# EAGLE board ProtoPass (EAGLE 9.0.1)
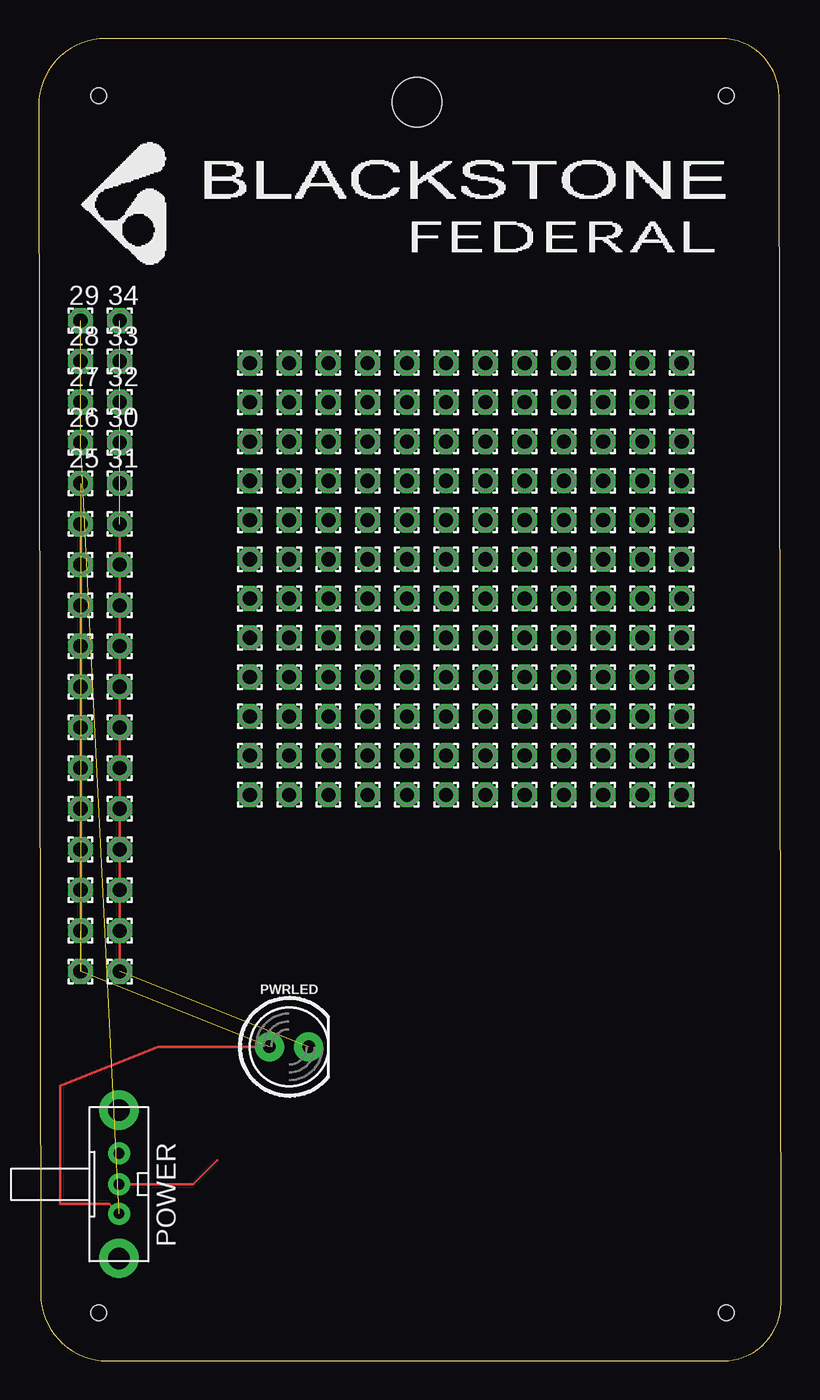
[diagram p0: board, top side]
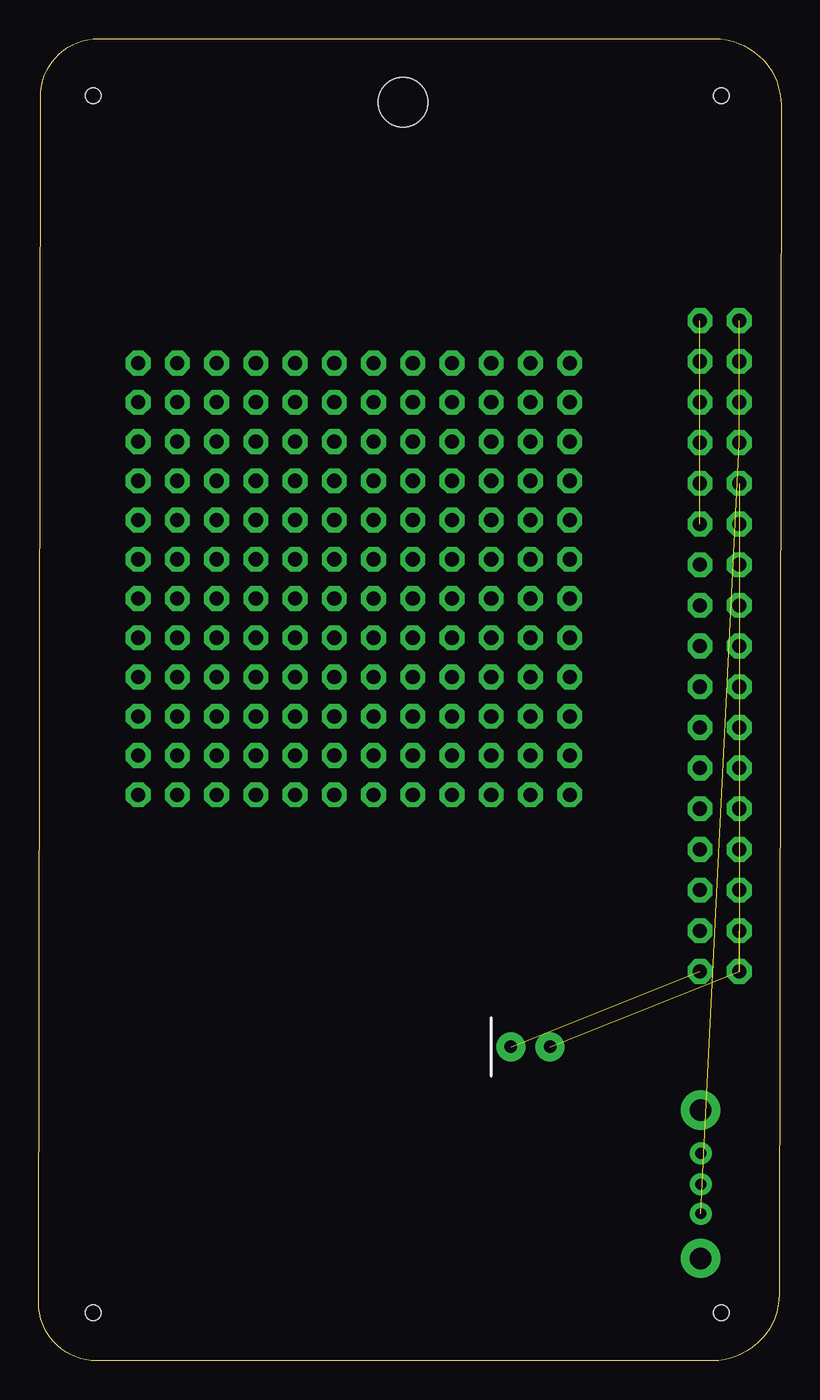
[diagram p1: board, bottom side, seen from below]

Size 48.05 x 85.56 mm. Coordinates in mm from the lower left corner, seen from the top.
Outline: 44.19,85.56 4.32,85.56 arc90 0,81.24 0.12,4.34 arc90 4.46,0 44.3,0 arc90 48.05,3.75 47.93,81.82 arc90 44.19,85.56
Copper layers (1*16): Top 0.035mm / dielectric 1.5mm / Bottom 0.035mm
Design rules "default": minimum track width 6mil, minimum drill 0.35mm, track to track 6mil, track to pad 6mil, pad to pad 6mil, via to via 6mil, smd to smd 6mil, copper to edge 40mil, drill to drill 6mil, minimum pad ring 10mil, minimum via ring 8mil, stop-mask expansion 4mil, vias tented up to drill 0mil, thermal gap 10mil
Holes 3.2 mm at 24.48,81.43
Holes 1 mm at 44.51,3.1 3.87,3.1 44.52,81.86 3.88,81.86

## Footprints (pad centres in the part's own frame; a part is rotated, then mirrored left to right if it is on the bottom)
1,6/0,9 = drill 0.914 pad 1.6 octagon: 1 0,0
EG1213 = drill 0.7 pad 1.422: 1 -2,0; 2 0,0; 3 1.9,0 | drill 1.4 pad 2.54: MT1 -4.8,0; MT2 4.8,0
LED_5MM = drill 0.813 pad 1.88: A -1.27,0; K 1.27,0

## Placement (x,y rotation side)
1  [1,6/0,9]  2.71,25.2 270 top
2  [1,6/0,9]  2.71,27.83 270 top
3  [1,6/0,9]  2.71,30.46 270 top
4  [1,6/0,9]  2.71,33.09 270 top
5  [1,6/0,9]  2.71,35.73 270 top
6  [1,6/0,9]  2.71,38.36 270 top
7  [1,6/0,9]  2.71,40.99 270 top
8  [1,6/0,9]  2.71,43.62 270 top
9  [1,6/0,9]  2.71,46.25 270 top
10  [1,6/0,9]  2.71,48.89 270 top
11  [1,6/0,9]  2.71,51.52 270 top
12  _  [1,6/0,9]  2.71,54.15 270 top
13  [1,6/0,9]  5.25,54.15 0 top
14  [1,6/0,9]  5.25,51.52 180 top
15  [1,6/0,9]  5.25,48.89 270 top
16  [1,6/0,9]  5.25,46.25 270 top
17  [1,6/0,9]  5.25,43.62 270 top
18  [1,6/0,9]  5.25,40.99 270 top
19  [1,6/0,9]  5.25,38.36 270 top
20  [1,6/0,9]  5.25,35.73 270 top
21  [1,6/0,9]  5.25,33.09 270 top
22  [1,6/0,9]  5.25,30.46 270 top
23  [1,6/0,9]  5.25,27.83 270 top
24  [1,6/0,9]  5.25,25.2 270 top
25  _  [1,6/0,9]  2.71,56.78 0 top
26  _  [1,6/0,9]  2.71,59.41 0 top
27  _  [1,6/0,9]  2.71,62.05 0 top
28  _  [1,6/0,9]  2.71,64.68 0 top
29  _  [1,6/0,9]  2.71,67.31 0 top
30  [1,6/0,9]  5.25,59.41 0 top
31  [1,6/0,9]  5.25,56.78 0 top
32  [1,6/0,9]  5.25,62.05 0 top
33  [1,6/0,9]  5.25,64.68 0 top
34  [1,6/0,9]  5.25,67.31 0 top
PAD1  [1,6/0,9]  41.62,36.63 0 top
PAD2  [1,6/0,9]  41.62,39.17 0 top
PAD3  [1,6/0,9]  41.62,41.71 0 top
PAD4  [1,6/0,9]  41.62,44.25 0 top
PAD5  [1,6/0,9]  41.62,46.79 0 top
PAD6  [1,6/0,9]  41.62,49.33 0 top
PAD7  [1,6/0,9]  41.62,51.87 0 top
PAD8  [1,6/0,9]  41.62,54.41 0 top
PAD9  [1,6/0,9]  41.62,56.95 0 top
PAD10  [1,6/0,9]  41.62,59.49 0 top
PAD11  [1,6/0,9]  41.62,62.03 0 top
PAD12  [1,6/0,9]  41.62,64.57 0 top
PAD13  [1,6/0,9]  39.08,36.63 0 top
PAD14  [1,6/0,9]  39.08,39.17 0 top
PAD15  [1,6/0,9]  39.08,41.71 0 top
PAD16  [1,6/0,9]  39.08,44.25 0 top
PAD17  [1,6/0,9]  39.08,46.79 0 top
PAD18  [1,6/0,9]  39.08,49.33 0 top
PAD19  [1,6/0,9]  39.08,51.87 0 top
PAD20  [1,6/0,9]  39.08,54.41 0 top
PAD21  [1,6/0,9]  39.08,56.95 0 top
PAD22  [1,6/0,9]  39.08,59.49 0 top
PAD23  [1,6/0,9]  39.08,62.03 0 top
PAD24  [1,6/0,9]  39.08,64.57 0 top
PAD25  [1,6/0,9]  36.54,36.63 0 top
PAD26  [1,6/0,9]  36.54,39.17 0 top
PAD27  [1,6/0,9]  36.54,41.71 0 top
PAD28  [1,6/0,9]  36.54,44.25 0 top
PAD29  [1,6/0,9]  36.54,46.79 0 top
PAD30  [1,6/0,9]  36.54,49.33 0 top
PAD31  [1,6/0,9]  36.54,51.87 0 top
PAD32  [1,6/0,9]  36.54,54.41 0 top
PAD33  [1,6/0,9]  36.54,56.95 0 top
PAD34  [1,6/0,9]  36.54,59.49 0 top
PAD35  [1,6/0,9]  36.54,62.03 0 top
PAD36  [1,6/0,9]  36.54,64.57 0 top
PAD37  [1,6/0,9]  34,36.63 0 top
PAD38  [1,6/0,9]  34,39.17 0 top
PAD39  [1,6/0,9]  34,41.71 0 top
PAD40  [1,6/0,9]  34,44.25 0 top
PAD41  [1,6/0,9]  34,46.79 0 top
PAD42  [1,6/0,9]  34,49.33 0 top
PAD43  [1,6/0,9]  34,51.87 0 top
PAD44  [1,6/0,9]  34,54.41 0 top
PAD45  [1,6/0,9]  34,56.95 0 top
PAD46  [1,6/0,9]  34,59.49 0 top
PAD47  [1,6/0,9]  34,62.03 0 top
PAD48  [1,6/0,9]  34,64.57 0 top
PAD49  [1,6/0,9]  31.46,36.63 0 top
PAD50  [1,6/0,9]  31.46,39.17 0 top
PAD51  [1,6/0,9]  31.46,41.71 0 top
PAD52  [1,6/0,9]  31.46,44.25 0 top
PAD53  [1,6/0,9]  31.46,46.79 0 top
PAD54  [1,6/0,9]  31.46,49.33 0 top
PAD55  [1,6/0,9]  31.46,51.87 0 top
PAD56  [1,6/0,9]  31.46,54.41 0 top
PAD57  [1,6/0,9]  31.46,56.95 0 top
PAD58  [1,6/0,9]  31.46,59.49 0 top
PAD59  [1,6/0,9]  31.46,62.03 0 top
PAD60  [1,6/0,9]  31.46,64.57 0 top
PAD61  [1,6/0,9]  28.92,36.63 0 top
PAD62  [1,6/0,9]  28.92,39.17 0 top
PAD63  [1,6/0,9]  28.92,41.71 0 top
PAD64  [1,6/0,9]  28.92,44.25 0 top
PAD65  [1,6/0,9]  28.92,46.79 0 top
PAD66  [1,6/0,9]  28.92,49.33 0 top
PAD67  [1,6/0,9]  28.92,51.87 0 top
PAD68  [1,6/0,9]  28.92,54.41 0 top
PAD69  [1,6/0,9]  28.92,56.95 0 top
PAD70  [1,6/0,9]  28.92,59.49 0 top
PAD71  [1,6/0,9]  28.92,62.03 0 top
PAD72  [1,6/0,9]  28.92,64.57 0 top
PAD97  [1,6/0,9]  26.38,36.63 0 top
PAD98  [1,6/0,9]  26.38,39.17 0 top
PAD99  [1,6/0,9]  26.38,41.71 0 top
PAD100  [1,6/0,9]  26.38,44.25 0 top
PAD101  [1,6/0,9]  26.38,46.79 0 top
PAD102  [1,6/0,9]  26.38,49.33 0 top
PAD103  [1,6/0,9]  26.38,51.87 0 top
PAD104  [1,6/0,9]  26.38,54.41 0 top
PAD105  [1,6/0,9]  26.38,56.95 0 top
PAD106  [1,6/0,9]  26.38,59.49 0 top
PAD107  [1,6/0,9]  26.38,62.03 0 top
PAD108  [1,6/0,9]  26.38,64.57 0 top
PAD109  [1,6/0,9]  23.84,36.63 0 top
PAD110  [1,6/0,9]  23.84,39.17 0 top
PAD111  [1,6/0,9]  23.84,41.71 0 top
PAD112  [1,6/0,9]  23.84,44.25 0 top
PAD113  [1,6/0,9]  23.84,46.79 0 top
PAD114  [1,6/0,9]  23.84,49.33 0 top
PAD115  [1,6/0,9]  23.84,51.87 0 top
PAD116  [1,6/0,9]  23.84,54.41 0 top
PAD117  [1,6/0,9]  23.84,56.95 0 top
PAD118  [1,6/0,9]  23.84,59.49 0 top
PAD119  [1,6/0,9]  23.84,62.03 0 top
PAD120  [1,6/0,9]  23.84,64.57 0 top
PAD121  [1,6/0,9]  21.3,36.63 0 top
PAD122  [1,6/0,9]  21.3,39.17 0 top
PAD123  [1,6/0,9]  21.3,41.71 0 top
PAD124  [1,6/0,9]  21.3,44.25 0 top
PAD125  [1,6/0,9]  21.3,46.79 0 top
PAD126  [1,6/0,9]  21.3,49.33 0 top
PAD127  [1,6/0,9]  21.3,51.87 0 top
PAD128  [1,6/0,9]  21.3,54.41 0 top
PAD129  [1,6/0,9]  21.3,56.95 0 top
PAD130  [1,6/0,9]  21.3,59.49 0 top
PAD131  [1,6/0,9]  21.3,62.03 0 top
PAD132  [1,6/0,9]  21.3,64.57 0 top
PAD133  [1,6/0,9]  18.76,36.63 0 top
PAD134  [1,6/0,9]  18.76,39.17 0 top
PAD135  [1,6/0,9]  18.76,41.71 0 top
PAD136  [1,6/0,9]  18.76,44.25 0 top
PAD137  [1,6/0,9]  18.76,46.79 0 top
PAD138  [1,6/0,9]  18.76,49.33 0 top
PAD139  [1,6/0,9]  18.76,51.87 0 top
PAD140  [1,6/0,9]  18.76,54.41 0 top
PAD141  [1,6/0,9]  18.76,56.95 0 top
PAD142  [1,6/0,9]  18.76,59.49 0 top
PAD143  [1,6/0,9]  18.76,62.03 0 top
PAD144  [1,6/0,9]  18.76,64.57 0 top
PAD145  [1,6/0,9]  16.22,36.63 0 top
PAD146  [1,6/0,9]  16.22,39.17 0 top
PAD147  [1,6/0,9]  16.22,41.71 0 top
PAD148  [1,6/0,9]  16.22,44.25 0 top
PAD149  [1,6/0,9]  16.22,46.79 0 top
PAD150  [1,6/0,9]  16.22,49.33 0 top
PAD151  [1,6/0,9]  16.22,51.87 0 top
PAD152  [1,6/0,9]  16.22,54.41 0 top
PAD153  [1,6/0,9]  16.22,56.95 0 top
PAD154  [1,6/0,9]  16.22,59.49 0 top
PAD155  [1,6/0,9]  16.22,62.03 0 top
PAD156  [1,6/0,9]  16.22,64.57 0 top
PAD157  [1,6/0,9]  13.68,36.63 0 top
PAD158  [1,6/0,9]  13.68,39.17 0 top
PAD159  [1,6/0,9]  13.68,41.71 0 top
PAD160  [1,6/0,9]  13.68,44.25 0 top
PAD161  [1,6/0,9]  13.68,46.79 0 top
PAD162  [1,6/0,9]  13.68,49.33 0 top
PAD163  [1,6/0,9]  13.68,51.87 0 top
PAD164  [1,6/0,9]  13.68,54.41 0 top
PAD165  [1,6/0,9]  13.68,56.95 0 top
PAD166  [1,6/0,9]  13.68,59.49 0 top
PAD167  [1,6/0,9]  13.68,64.57 0 top
PAD168  [1,6/0,9]  13.68,62.03 0 top
POWER  EG1213  [EG1213]  5.2,11.43 270 top
PWRLED  [LED_5MM]  16.22,20.32 0 top

## Library data of the parts
1-34 PAD1-PAD72 PAD97-PAD168 = wirepad
POWER = adafruit
PWRLED = SparkFun-LED

## Nets
N$1: 13.1 14.1 15.1 16.1 17.1 18.1 19.1 20.1 21.1 22.1 23.1 24.1 30.1 31.1 32.1 33.1 34.1 PWRLED.K
N$2: POWER.2
N$4: 1.1 2.1 3.1 4.1 5.1 6.1 7.1 8.1 9.1 10.1 11.1 12.1 25.1 26.1 27.1 28.1 29.1 POWER.3 PWRLED.A

## Tracks (layer width: path | path; a pad name or v marks a point on that pad's centre or on a via)
N$1  (6 unrouted)
  Top 0.152: 13.1 14.1 15.1 16.1 17.1 18.1 19.1 20.1 21.1 22.1 23.1 24.1
N$2
  Top 0.152: POWER.2 9.99,11.43 11.54,12.98
N$4  (7 unrouted)
  Top 0.152: 2.1 3.1 4.1 5.1 6.1 7.1 8.1 9.1 10.1 11.1 12.1 | PWRLED.A 7.74,20.32 1.39,17.78 1.39,10.16 4.57,10.16 POWER.3